# EAGLE board MAX3232_Breakout_Panel_v11 (EAGLE 6.6.0), part 1 of 2
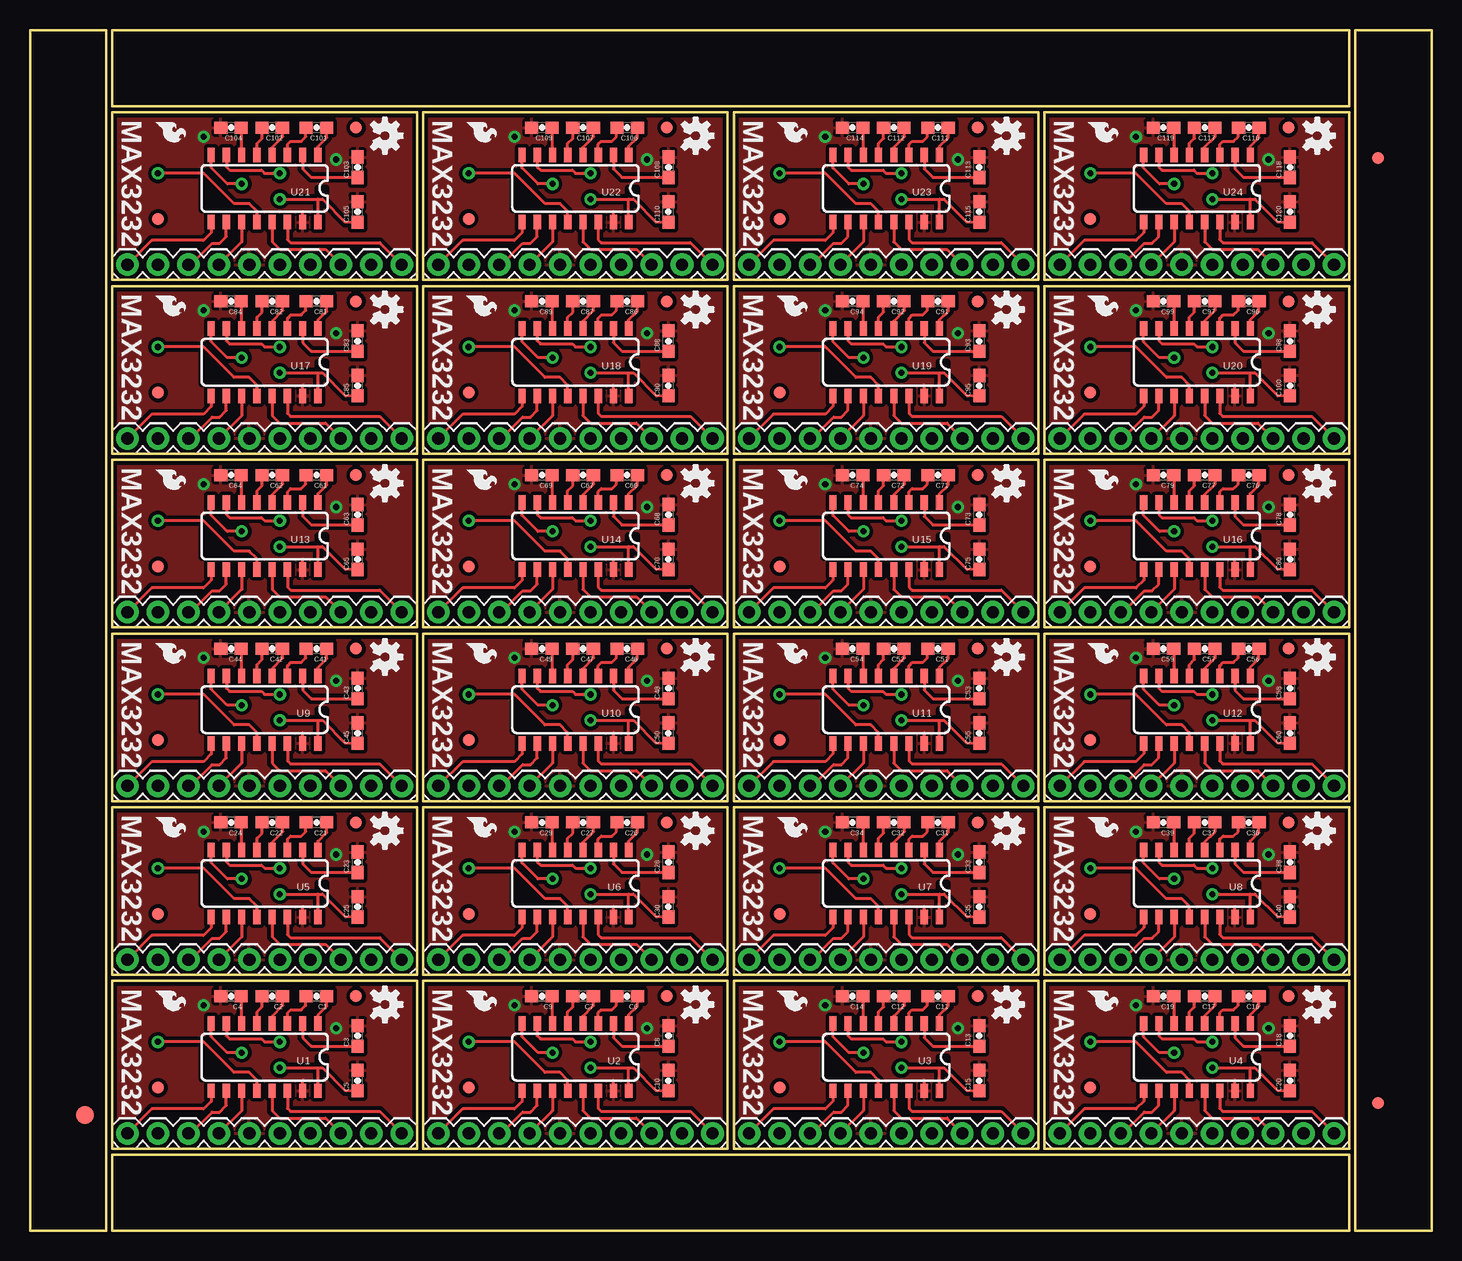
[diagram p0: board, top side]
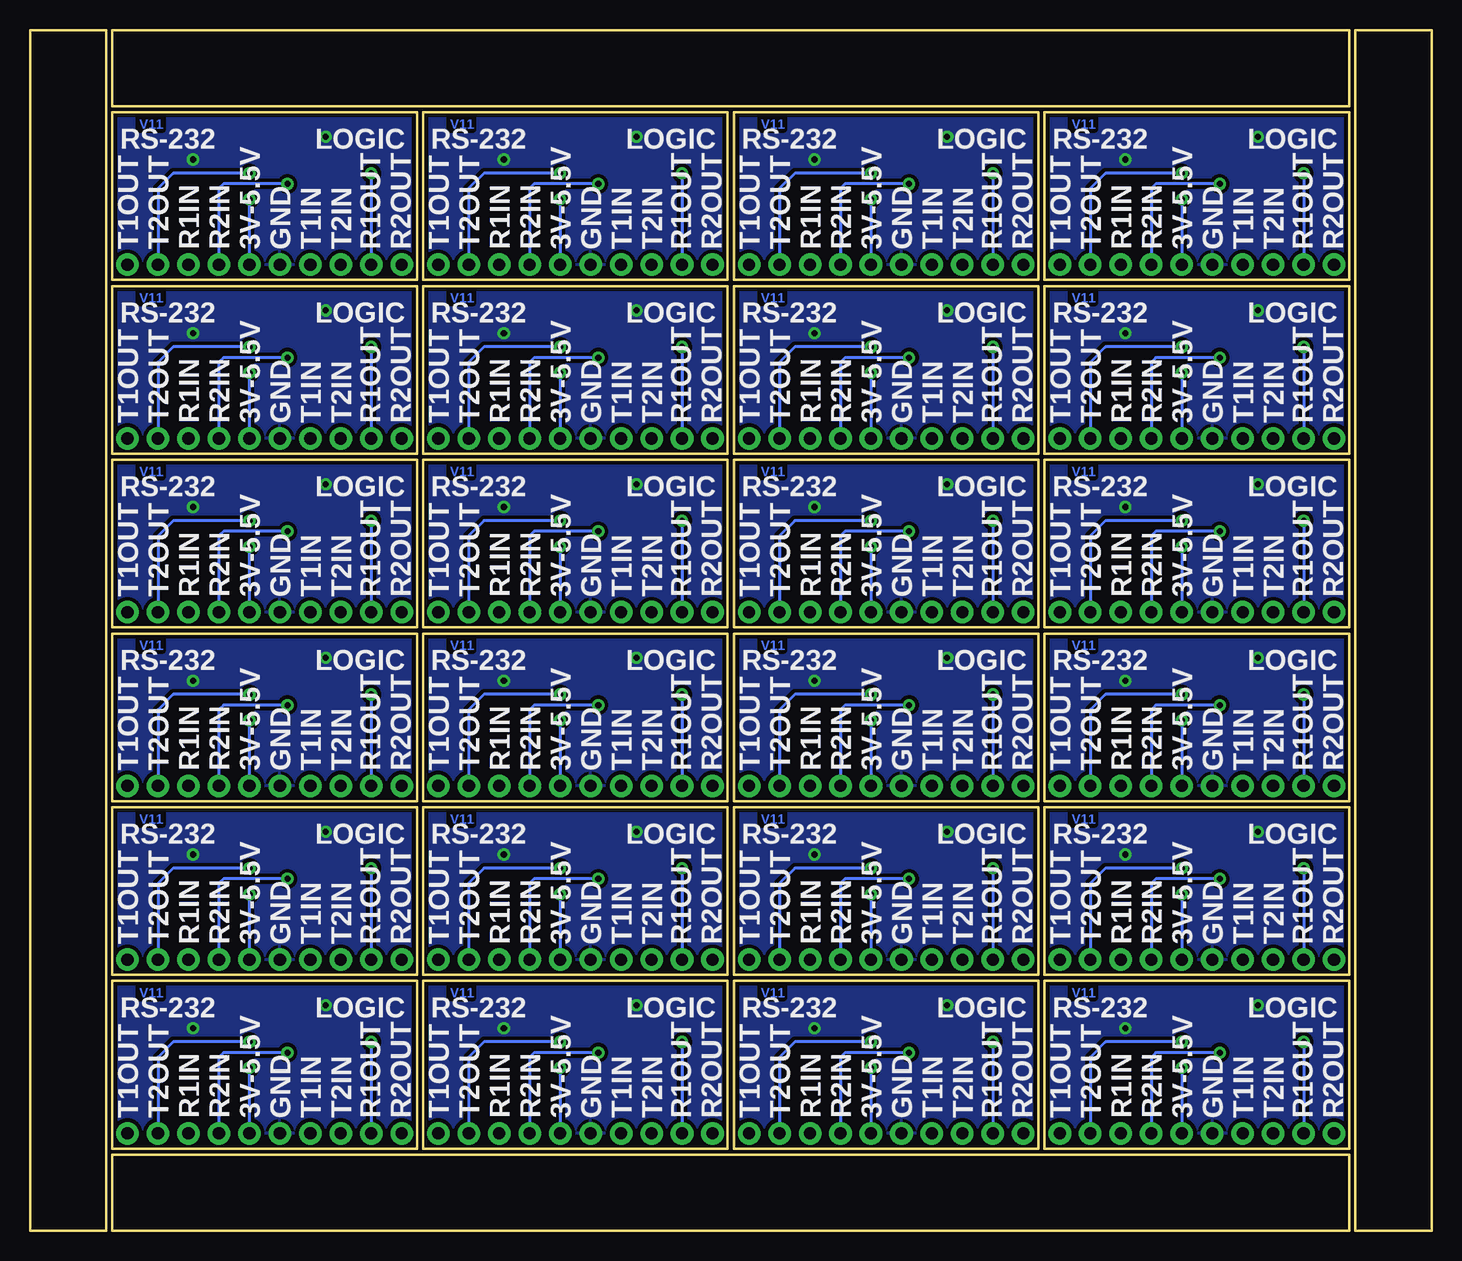
[diagram p1: board, bottom side, seen from below]

Size 116.84 x 100.08 mm. Coordinates in mm from the lower left corner, seen from the top.
Outline: 6.35,79.25 6.35,0 0,0 0,29.72
Outline: 116.84,79.25 116.84,0 110.49,0 110.49,29.72
Outline: 110.49,20.83 110.49,100.08 116.84,100.08 116.84,70.36
Outline: 0,20.83 0,100.08 6.35,100.08 6.35,70.36
Outline: 6.86,6.86 6.86,20.83 32.26,20.83 32.26,6.86 6.86,6.86
Outline: 32.77,6.86 32.77,20.83 58.17,20.83 58.17,6.86 32.77,6.86
Outline: 58.67,6.86 58.67,20.83 84.07,20.83 84.07,6.86 58.67,6.86
Outline: 84.58,6.86 84.58,20.83 109.98,20.83 109.98,6.86 84.58,6.86
Outline: 6.86,21.34 6.86,35.31 32.26,35.31 32.26,21.34 6.86,21.34
Outline: 32.77,21.34 32.77,35.31 58.17,35.31 58.17,21.34 32.77,21.34
Outline: 58.67,21.34 58.67,35.31 84.07,35.31 84.07,21.34 58.67,21.34
Outline: 84.58,21.34 84.58,35.31 109.98,35.31 109.98,21.34 84.58,21.34
Outline: 6.86,35.81 6.86,49.78 32.26,49.78 32.26,35.81 6.86,35.81
Outline: 32.77,35.81 32.77,49.78 58.17,49.78 58.17,35.81 32.77,35.81
Outline: 58.67,35.81 58.67,49.78 84.07,49.78 84.07,35.81 58.67,35.81
Outline: 84.58,35.81 84.58,49.78 109.98,49.78 109.98,35.81 84.58,35.81
Outline: 6.86,50.29 6.86,64.26 32.26,64.26 32.26,50.29 6.86,50.29
Outline: 32.77,50.29 32.77,64.26 58.17,64.26 58.17,50.29 32.77,50.29
Outline: 58.67,50.29 58.67,64.26 84.07,64.26 84.07,50.29 58.67,50.29
Outline: 84.58,50.29 84.58,64.26 109.98,64.26 109.98,50.29 84.58,50.29
Outline: 6.86,64.77 6.86,78.74 32.26,78.74 32.26,64.77 6.86,64.77
Outline: 32.77,64.77 32.77,78.74 58.17,78.74 58.17,64.77 32.77,64.77
Outline: 58.67,64.77 58.67,78.74 84.07,78.74 84.07,64.77 58.67,64.77
Outline: 84.58,64.77 84.58,78.74 109.98,78.74 109.98,64.77 84.58,64.77
Outline: 6.86,79.25 6.86,93.22 32.26,93.22 32.26,79.25 6.86,79.25
Outline: 32.77,79.25 32.77,93.22 58.17,93.22 58.17,79.25 32.77,79.25
Outline: 58.67,79.25 58.67,93.22 84.07,93.22 84.07,79.25 58.67,79.25
Outline: 84.58,79.25 84.58,93.22 109.98,93.22 109.98,79.25 84.58,79.25
Outline: 6.86,0 109.98,0 109.98,6.35 6.86,6.35 6.86,0
Outline: 109.98,100.08 6.86,100.08 6.86,93.73 109.98,93.73 109.98,100.08
Copper layers (1*16): Top 0.035mm / dielectric 1.5mm / Bottom 0.035mm
Design rules "SparkFun-2-layer": minimum track width 7mil, minimum drill 15mil, track to track 8mil, track to pad 8mil, pad to pad 8mil, via to via 8mil, smd to smd 8mil, copper to edge 8mil, drill to drill 8mil, minimum pad ring 12mil, minimum via ring 10mil, stop-mask expansion 4mil, vias tented up to drill 20mil, thermal gap 10mil
tRestrict: area 24,14.1 to 24.6,14.5; area 14.4,12.7 to 14.5,15.4; area 49.9,14.1 to 50.5,14.5; area 40.3,12.7 to 40.4,15.4; area 75.8,14.1 to 76.5,14.5; area 66.2,12.7 to 66.3,15.4; area 101.7,14.1 to 102.4,14.5; area 92.1,12.7 to 92.2,15.4; area 24,28.6 to 24.6,29; area 14.4,27.2 to 14.5,29.8; area 49.9,28.6 to 50.5,29; area 40.3,27.2 to 40.4,29.8; area 75.8,28.6 to 76.5,29; area 66.2,27.2 to 66.3,29.8; area 101.7,28.6 to 102.4,29; area 92.1,27.2 to 92.2,29.8; area 24,43.1 to 24.6,43.4; area 14.4,41.7 to 14.5,44.3; area 49.9,43.1 to 50.5,43.4; area 40.3,41.7 to 40.4,44.3; area 75.8,43.1 to 76.5,43.4; area 66.2,41.7 to 66.3,44.3; area 101.7,43.1 to 102.4,43.4; area 92.1,41.7 to 92.2,44.3; area 24,57.5 to 24.6,57.9; area 14.4,56.1 to 14.5,58.8; area 49.9,57.5 to 50.5,57.9; area 40.3,56.1 to 40.4,58.8; area 75.8,57.5 to 76.5,57.9; area 66.2,56.1 to 66.3,58.8; area 101.7,57.5 to 102.4,57.9; area 92.1,56.1 to 92.2,58.8; area 24,72 to 24.6,72.4; area 14.4,70.6 to 14.5,73.3; area 49.9,72 to 50.5,72.4; area 40.3,70.6 to 40.4,73.3; area 75.8,72 to 76.5,72.4; area 66.2,70.6 to 66.3,73.3; area 101.7,72 to 102.4,72.4; area 92.1,70.6 to 92.2,73.3; area 24,86.5 to 24.6,86.9; area 14.4,85.1 to 14.5,87.8; area 49.9,86.5 to 50.5,86.9; area 40.3,85.1 to 40.4,87.8; area 75.8,86.5 to 76.5,86.9; area 66.2,85.1 to 66.3,87.8; area 101.7,86.5 to 102.4,86.9; area 92.1,85.1 to 92.2,87.8

## Footprints (pad centres in the part's own frame; a part is rotated, then mirrored left to right if it is on the bottom)
0603-CAP = smd 1.1 x 1: 1 -0.85,0; 2 0.85,0
FIDUCIAL-1.5X3 = smd 1.5 x 1.5: 1 0,0
FIDUCIAL-1X2 = smd 1 x 1: 1 0,0
1X10 = drill 1.016 pad 1.88: 1 0,0; 2 2.54,0; 3 5.08,0; 4 7.62,0; 5 10.16,0; 6 12.7,0; 7 15.24,0; 8 17.78,0; 9 20.32,0; 10 22.86,0
SO016 = smd 0.6 x 1.2: 1 -4.445,-2.8; 2 -3.175,-2.8; 3 -1.905,-2.8; 4 -0.635,-2.8; 5 0.635,-2.8; 6 1.905,-2.8; 7 3.175,-2.8; 8 4.445,-2.8; 9 4.445,2.8; 10 3.175,2.8; 11 1.905,2.8; 12 0.635,2.8; 13 -0.635,2.8; 14 -1.905,2.8; 15 -3.175,2.8; 16 -4.445,2.8

## Placement (x,y rotation side)
C1  .1uF  [0603-CAP]  23.88,19.56 180 top
C2  .1uF  [0603-CAP]  20.19,19.56 180 top
C3  .1uF  [0603-CAP]  27.31,16.25 90 top
C4  .1uF  [0603-CAP]  16.76,19.56 180 top
C5  .1uF  [0603-CAP]  27.31,12.53 90 top
C6  .1uF  [0603-CAP]  49.78,19.56 180 top
C7  .1uF  [0603-CAP]  46.1,19.56 180 top
C8  .1uF  [0603-CAP]  53.22,16.25 90 top
C9  .1uF  [0603-CAP]  42.67,19.56 180 top
C10  .1uF  [0603-CAP]  53.22,12.53 90 top
C11  .1uF  [0603-CAP]  75.69,19.56 180 top
C12  .1uF  [0603-CAP]  72.01,19.56 180 top
C13  .1uF  [0603-CAP]  79.13,16.25 90 top
C14  .1uF  [0603-CAP]  68.58,19.56 180 top
C15  .1uF  [0603-CAP]  79.13,12.53 90 top
C16  .1uF  [0603-CAP]  101.6,19.56 180 top
C17  .1uF  [0603-CAP]  97.92,19.56 180 top
C18  .1uF  [0603-CAP]  105.04,16.25 90 top
C19  .1uF  [0603-CAP]  94.49,19.56 180 top
C20  .1uF  [0603-CAP]  105.03,12.53 90 top
C21  .1uF  [0603-CAP]  23.88,34.04 180 top
C22  .1uF  [0603-CAP]  20.19,34.04 180 top
C23  .1uF  [0603-CAP]  27.31,30.72 90 top
C24  .1uF  [0603-CAP]  16.76,34.04 180 top
C25  .1uF  [0603-CAP]  27.31,27.01 90 top
C26  .1uF  [0603-CAP]  49.78,34.04 180 top
C27  .1uF  [0603-CAP]  46.1,34.04 180 top
C28  .1uF  [0603-CAP]  53.22,30.72 90 top
C29  .1uF  [0603-CAP]  42.67,34.04 180 top
C30  .1uF  [0603-CAP]  53.22,27.01 90 top
C31  .1uF  [0603-CAP]  75.69,34.04 180 top
C32  .1uF  [0603-CAP]  72.01,34.04 180 top
C33  .1uF  [0603-CAP]  79.13,30.72 90 top
C34  .1uF  [0603-CAP]  68.58,34.04 180 top
C35  .1uF  [0603-CAP]  79.13,27.01 90 top
C36  .1uF  [0603-CAP]  101.6,34.04 180 top
C37  .1uF  [0603-CAP]  97.92,34.04 180 top
C38  .1uF  [0603-CAP]  105.04,30.72 90 top
C39  .1uF  [0603-CAP]  94.49,34.04 180 top
C40  .1uF  [0603-CAP]  105.03,27.01 90 top
C41  .1uF  [0603-CAP]  23.88,48.51 180 top
C42  .1uF  [0603-CAP]  20.19,48.51 180 top
C43  .1uF  [0603-CAP]  27.31,45.2 90 top
C44  .1uF  [0603-CAP]  16.76,48.51 180 top
C45  .1uF  [0603-CAP]  27.31,41.48 90 top
C46  .1uF  [0603-CAP]  49.78,48.51 180 top
C47  .1uF  [0603-CAP]  46.1,48.51 180 top
C48  .1uF  [0603-CAP]  53.22,45.2 90 top
C49  .1uF  [0603-CAP]  42.67,48.51 180 top
C50  .1uF  [0603-CAP]  53.22,41.48 90 top
C51  .1uF  [0603-CAP]  75.69,48.51 180 top
C52  .1uF  [0603-CAP]  72.01,48.51 180 top
C53  .1uF  [0603-CAP]  79.13,45.2 90 top
C54  .1uF  [0603-CAP]  68.58,48.51 180 top
C55  .1uF  [0603-CAP]  79.13,41.48 90 top
C56  .1uF  [0603-CAP]  101.6,48.51 180 top
C57  .1uF  [0603-CAP]  97.92,48.51 180 top
C58  .1uF  [0603-CAP]  105.04,45.2 90 top
C59  .1uF  [0603-CAP]  94.49,48.51 180 top
C60  .1uF  [0603-CAP]  105.03,41.48 90 top
C61  .1uF  [0603-CAP]  23.88,62.99 180 top
C62  .1uF  [0603-CAP]  20.19,62.99 180 top
C63  .1uF  [0603-CAP]  27.31,59.68 90 top
C64  .1uF  [0603-CAP]  16.76,62.99 180 top
C65  .1uF  [0603-CAP]  27.31,55.96 90 top
C66  .1uF  [0603-CAP]  49.78,62.99 180 top
C67  .1uF  [0603-CAP]  46.1,62.99 180 top
C68  .1uF  [0603-CAP]  53.22,59.68 90 top
C69  .1uF  [0603-CAP]  42.67,62.99 180 top
C70  .1uF  [0603-CAP]  53.22,55.96 90 top
C71  .1uF  [0603-CAP]  75.69,62.99 180 top
C72  .1uF  [0603-CAP]  72.01,62.99 180 top
C73  .1uF  [0603-CAP]  79.13,59.68 90 top
C74  .1uF  [0603-CAP]  68.58,62.99 180 top
C75  .1uF  [0603-CAP]  79.13,55.96 90 top
C76  .1uF  [0603-CAP]  101.6,62.99 180 top
C77  .1uF  [0603-CAP]  97.92,62.99 180 top
C78  .1uF  [0603-CAP]  105.04,59.68 90 top
C79  .1uF  [0603-CAP]  94.49,62.99 180 top
C80  .1uF  [0603-CAP]  105.03,55.96 90 top
C81  .1uF  [0603-CAP]  23.88,77.47 180 top
C82  .1uF  [0603-CAP]  20.19,77.47 180 top
C83  .1uF  [0603-CAP]  27.31,74.16 90 top
C84  .1uF  [0603-CAP]  16.76,77.47 180 top
C85  .1uF  [0603-CAP]  27.31,70.44 90 top
C86  .1uF  [0603-CAP]  49.78,77.47 180 top
C87  .1uF  [0603-CAP]  46.1,77.47 180 top
C88  .1uF  [0603-CAP]  53.22,74.16 90 top
C89  .1uF  [0603-CAP]  42.67,77.47 180 top
C90  .1uF  [0603-CAP]  53.22,70.44 90 top
C91  .1uF  [0603-CAP]  75.69,77.47 180 top
C92  .1uF  [0603-CAP]  72.01,77.47 180 top
C93  .1uF  [0603-CAP]  79.13,74.16 90 top
C94  .1uF  [0603-CAP]  68.58,77.47 180 top
C95  .1uF  [0603-CAP]  79.13,70.44 90 top
C96  .1uF  [0603-CAP]  101.6,77.47 180 top
C97  .1uF  [0603-CAP]  97.92,77.47 180 top
C98  .1uF  [0603-CAP]  105.04,74.16 90 top
C99  .1uF  [0603-CAP]  94.49,77.47 180 top
C100  .1uF  [0603-CAP]  105.03,70.44 90 top
C101  .1uF  [0603-CAP]  23.88,91.95 180 top
C102  .1uF  [0603-CAP]  20.19,91.95 180 top
C103  .1uF  [0603-CAP]  27.31,88.64 90 top
C104  .1uF  [0603-CAP]  16.76,91.95 180 top
C105  .1uF  [0603-CAP]  27.31,84.92 90 top
C106  .1uF  [0603-CAP]  49.78,91.95 180 top
C107  .1uF  [0603-CAP]  46.1,91.95 180 top
C108  .1uF  [0603-CAP]  53.22,88.64 90 top
C109  .1uF  [0603-CAP]  42.67,91.95 180 top
C110  .1uF  [0603-CAP]  53.22,84.92 90 top
C111  .1uF  [0603-CAP]  75.69,91.95 180 top
C112  .1uF  [0603-CAP]  72.01,91.95 180 top
C113  .1uF  [0603-CAP]  79.13,88.64 90 top
C114  .1uF  [0603-CAP]  68.58,91.95 180 top
C115  .1uF  [0603-CAP]  79.13,84.92 90 top
C116  .1uF  [0603-CAP]  101.6,91.95 180 top
C117  .1uF  [0603-CAP]  97.92,91.95 180 top
C118  .1uF  [0603-CAP]  105.04,88.64 90 top
C119  .1uF  [0603-CAP]  94.49,91.95 180 top
C120  .1uF  [0603-CAP]  105.03,84.92 90 top
E$1  [FIDUCIAL-1.5X3]  4.57,9.65 0 top
E$4  [FIDUCIAL-1X2]  112.39,10.67 0 top
E$5  [FIDUCIAL-1X2]  112.39,89.41 180 top
FID1  FIDUCIAL1X2  [FIDUCIAL-1X2]  10.67,11.94 0 top
FID2  FIDUCIAL1X2  [FIDUCIAL-1X2]  27.18,19.56 0 top
FID3  FIDUCIAL1X2  [FIDUCIAL-1X2]  36.58,11.94 0 top
FID4  FIDUCIAL1X2  [FIDUCIAL-1X2]  53.09,19.56 0 top
FID5  FIDUCIAL1X2  [FIDUCIAL-1X2]  62.48,11.94 0 top
FID6  FIDUCIAL1X2  [FIDUCIAL-1X2]  78.99,19.56 0 top
FID7  FIDUCIAL1X2  [FIDUCIAL-1X2]  88.39,11.94 0 top
FID8  FIDUCIAL1X2  [FIDUCIAL-1X2]  104.9,19.56 0 top
FID9  FIDUCIAL1X2  [FIDUCIAL-1X2]  10.67,26.42 0 top
FID10  FIDUCIAL1X2  [FIDUCIAL-1X2]  27.18,34.04 0 top
FID11  FIDUCIAL1X2  [FIDUCIAL-1X2]  36.58,26.42 0 top
FID12  FIDUCIAL1X2  [FIDUCIAL-1X2]  53.09,34.04 0 top
FID13  FIDUCIAL1X2  [FIDUCIAL-1X2]  62.48,26.42 0 top
FID14  FIDUCIAL1X2  [FIDUCIAL-1X2]  78.99,34.04 0 top
FID15  FIDUCIAL1X2  [FIDUCIAL-1X2]  88.39,26.42 0 top
FID16  FIDUCIAL1X2  [FIDUCIAL-1X2]  104.9,34.04 0 top
FID17  FIDUCIAL1X2  [FIDUCIAL-1X2]  10.67,40.89 0 top
FID18  FIDUCIAL1X2  [FIDUCIAL-1X2]  27.18,48.51 0 top
FID19  FIDUCIAL1X2  [FIDUCIAL-1X2]  36.58,40.89 0 top
FID20  FIDUCIAL1X2  [FIDUCIAL-1X2]  53.09,48.51 0 top
FID21  FIDUCIAL1X2  [FIDUCIAL-1X2]  62.48,40.89 0 top
FID22  FIDUCIAL1X2  [FIDUCIAL-1X2]  78.99,48.51 0 top
FID23  FIDUCIAL1X2  [FIDUCIAL-1X2]  88.39,40.89 0 top
FID24  FIDUCIAL1X2  [FIDUCIAL-1X2]  104.9,48.51 0 top
FID25  FIDUCIAL1X2  [FIDUCIAL-1X2]  10.67,55.37 0 top
FID26  FIDUCIAL1X2  [FIDUCIAL-1X2]  27.18,62.99 0 top
FID27  FIDUCIAL1X2  [FIDUCIAL-1X2]  36.58,55.37 0 top
FID28  FIDUCIAL1X2  [FIDUCIAL-1X2]  53.09,62.99 0 top
FID29  FIDUCIAL1X2  [FIDUCIAL-1X2]  62.48,55.37 0 top
FID30  FIDUCIAL1X2  [FIDUCIAL-1X2]  78.99,62.99 0 top
FID31  FIDUCIAL1X2  [FIDUCIAL-1X2]  88.39,55.37 0 top
FID32  FIDUCIAL1X2  [FIDUCIAL-1X2]  104.9,62.99 0 top
FID33  FIDUCIAL1X2  [FIDUCIAL-1X2]  10.67,69.85 0 top
FID34  FIDUCIAL1X2  [FIDUCIAL-1X2]  27.18,77.47 0 top
FID35  FIDUCIAL1X2  [FIDUCIAL-1X2]  36.58,69.85 0 top
FID36  FIDUCIAL1X2  [FIDUCIAL-1X2]  53.09,77.47 0 top
FID37  FIDUCIAL1X2  [FIDUCIAL-1X2]  62.48,69.85 0 top
FID38  FIDUCIAL1X2  [FIDUCIAL-1X2]  78.99,77.47 0 top
FID39  FIDUCIAL1X2  [FIDUCIAL-1X2]  88.39,69.85 0 top
FID40  FIDUCIAL1X2  [FIDUCIAL-1X2]  104.9,77.47 0 top
FID41  FIDUCIAL1X2  [FIDUCIAL-1X2]  10.67,84.33 0 top
FID42  FIDUCIAL1X2  [FIDUCIAL-1X2]  27.18,91.95 0 top
FID43  FIDUCIAL1X2  [FIDUCIAL-1X2]  36.58,84.33 0 top
FID44  FIDUCIAL1X2  [FIDUCIAL-1X2]  53.09,91.95 0 top
FID45  FIDUCIAL1X2  [FIDUCIAL-1X2]  62.48,84.33 0 top
FID46  FIDUCIAL1X2  [FIDUCIAL-1X2]  78.99,91.95 0 top
FID47  FIDUCIAL1X2  [FIDUCIAL-1X2]  88.39,84.33 0 top
FID48  FIDUCIAL1X2  [FIDUCIAL-1X2]  104.9,91.95 0 top
JP1  M10"  [1X10]  56.9,8.13 180 top
JP2  M10"  [1X10]  30.99,8.13 180 top
JP3  M10"  [1X10]  82.8,8.13 180 top
JP4  M10"  [1X10]  108.71,8.13 180 top
JP5  M10"  [1X10]  30.99,22.61 180 top
JP6  M10"  [1X10]  56.9,22.61 180 top
JP7  M10"  [1X10]  82.8,22.61 180 top
JP8  M10"  [1X10]  108.71,22.61 180 top
JP9  M10"  [1X10]  30.99,37.08 180 top
JP10  M10"  [1X10]  56.9,37.08 180 top
JP11  M10"  [1X10]  82.8,37.08 180 top
JP12  M10"  [1X10]  108.71,37.08 180 top
JP13  M10"  [1X10]  30.99,51.56 180 top
JP14  M10"  [1X10]  56.9,51.56 180 top
JP15  M10"  [1X10]  82.8,51.56 180 top
JP16  M10"  [1X10]  108.71,51.56 180 top
JP17  M10"  [1X10]  30.99,66.04 180 top
JP18  M10"  [1X10]  56.9,66.04 180 top
JP19  M10"  [1X10]  82.8,66.04 180 top
JP20  M10"  [1X10]  108.71,66.04 180 top
JP21  M10"  [1X10]  30.99,80.52 180 top
JP22  M10"  [1X10]  56.9,80.52 180 top
JP23  M10"  [1X10]  82.8,80.52 180 top
JP24  M10"  [1X10]  108.71,80.52 180 top
LOGO1  SFE_LOGO_FLAME.1_INCH  [SFE_LOGO_FLAME_.1]  10.1,20.32 270 top
LOGO2  SFE_LOGO_FLAME.1_INCH  [SFE_LOGO_FLAME_.1]  36.01,20.32 270 top
LOGO3  SFE_LOGO_FLAME.1_INCH  [SFE_LOGO_FLAME_.1]  61.92,20.32 270 top
LOGO4  SFE_LOGO_FLAME.1_INCH  [SFE_LOGO_FLAME_.1]  87.82,20.32 270 top
LOGO5  SFE_LOGO_FLAME.1_INCH  [SFE_LOGO_FLAME_.1]  10.1,34.8 270 top
LOGO6  SFE_LOGO_FLAME.1_INCH  [SFE_LOGO_FLAME_.1]  36.01,34.8 270 top
LOGO7  SFE_LOGO_FLAME.1_INCH  [SFE_LOGO_FLAME_.1]  61.92,34.8 270 top
LOGO8  SFE_LOGO_FLAME.1_INCH  [SFE_LOGO_FLAME_.1]  87.82,34.8 270 top
LOGO9  SFE_LOGO_FLAME.1_INCH  [SFE_LOGO_FLAME_.1]  10.1,49.28 270 top
LOGO10  SFE_LOGO_FLAME.1_INCH  [SFE_LOGO_FLAME_.1]  36.01,49.28 270 top
LOGO11  SFE_LOGO_FLAME.1_INCH  [SFE_LOGO_FLAME_.1]  61.92,49.28 270 top
LOGO12  SFE_LOGO_FLAME.1_INCH  [SFE_LOGO_FLAME_.1]  87.82,49.28 270 top
LOGO13  SFE_LOGO_FLAME.1_INCH  [SFE_LOGO_FLAME_.1]  10.1,63.75 270 top
LOGO14  SFE_LOGO_FLAME.1_INCH  [SFE_LOGO_FLAME_.1]  36.01,63.75 270 top
LOGO15  SFE_LOGO_FLAME.1_INCH  [SFE_LOGO_FLAME_.1]  61.92,63.75 270 top
LOGO16  SFE_LOGO_FLAME.1_INCH  [SFE_LOGO_FLAME_.1]  87.82,63.75 270 top
LOGO17  SFE_LOGO_FLAME.1_INCH  [SFE_LOGO_FLAME_.1]  10.1,78.23 270 top
LOGO18  SFE_LOGO_FLAME.1_INCH  [SFE_LOGO_FLAME_.1]  36.01,78.23 270 top
LOGO19  SFE_LOGO_FLAME.1_INCH  [SFE_LOGO_FLAME_.1]  61.92,78.23 270 top
LOGO20  SFE_LOGO_FLAME.1_INCH  [SFE_LOGO_FLAME_.1]  87.82,78.23 270 top
LOGO21  SFE_LOGO_FLAME.1_INCH  [SFE_LOGO_FLAME_.1]  10.1,92.71 270 top
LOGO22  SFE_LOGO_FLAME.1_INCH  [SFE_LOGO_FLAME_.1]  36.01,92.71 270 top
LOGO23  SFE_LOGO_FLAME.1_INCH  [SFE_LOGO_FLAME_.1]  61.92,92.71 270 top
LOGO24  SFE_LOGO_FLAME.1_INCH  [SFE_LOGO_FLAME_.1]  87.82,92.71 270 top
U1  MAX3232  [SO016]  19.56,14.48 180 top
U2  MAX3232  [SO016]  45.47,14.48 180 top
U3  MAX3232  [SO016]  71.37,14.48 180 top
U4  MAX3232  [SO016]  97.28,14.48 180 top
U5  MAX3232  [SO016]  19.56,28.96 180 top
U6  MAX3232  [SO016]  45.47,28.96 180 top
U7  MAX3232  [SO016]  71.37,28.96 180 top
U8  MAX3232  [SO016]  97.28,28.96 180 top
U9  MAX3232  [SO016]  19.56,43.43 180 top
U10  MAX3232  [SO016]  45.47,43.43 180 top
U11  MAX3232  [SO016]  71.37,43.43 180 top
U12  MAX3232  [SO016]  97.28,43.43 180 top
U13  MAX3232  [SO016]  19.56,57.91 180 top
U14  MAX3232  [SO016]  45.47,57.91 180 top
U15  MAX3232  [SO016]  71.37,57.91 180 top
U16  MAX3232  [SO016]  97.28,57.91 180 top
U17  MAX3232  [SO016]  19.56,72.39 180 top
U18  MAX3232  [SO016]  45.47,72.39 180 top
U19  MAX3232  [SO016]  71.37,72.39 180 top
U20  MAX3232  [SO016]  97.28,72.39 180 top
U21  MAX3232  [SO016]  19.56,86.87 180 top
U22  MAX3232  [SO016]  45.47,86.87 180 top
U23  MAX3232  [SO016]  71.37,86.87 180 top
U24  MAX3232  [SO016]  97.28,86.87 180 top
U$1  OSHW-LOGOS  [OSHW-LOGO-S]  29.59,18.87 270 top
U$2  OSHW-LOGOS  [OSHW-LOGO-S]  55.49,18.87 270 top
U$3  OSHW-LOGOS  [OSHW-LOGO-S]  81.4,18.87 270 top
U$4  OSHW-LOGOS  [OSHW-LOGO-S]  107.31,18.87 270 top
U$5  OSHW-LOGOS  [OSHW-LOGO-S]  29.59,33.35 270 top
U$6  OSHW-LOGOS  [OSHW-LOGO-S]  55.49,33.35 270 top
U$7  OSHW-LOGOS  [OSHW-LOGO-S]  81.4,33.35 270 top
U$8  OSHW-LOGOS  [OSHW-LOGO-S]  107.31,33.35 270 top
U$9  OSHW-LOGOS  [OSHW-LOGO-S]  29.59,47.83 270 top
U$10  OSHW-LOGOS  [OSHW-LOGO-S]  55.49,47.83 270 top
U$11  OSHW-LOGOS  [OSHW-LOGO-S]  81.4,47.83 270 top
U$12  OSHW-LOGOS  [OSHW-LOGO-S]  107.31,47.83 270 top
U$13  OSHW-LOGOS  [OSHW-LOGO-S]  29.59,62.3 270 top
U$14  OSHW-LOGOS  [OSHW-LOGO-S]  55.49,62.3 270 top
U$15  OSHW-LOGOS  [OSHW-LOGO-S]  81.4,62.3 270 top
U$16  OSHW-LOGOS  [OSHW-LOGO-S]  107.31,62.3 270 top
U$17  OSHW-LOGOS  [OSHW-LOGO-S]  29.59,76.78 270 top
U$18  OSHW-LOGOS  [OSHW-LOGO-S]  55.49,76.78 270 top
U$19  OSHW-LOGOS  [OSHW-LOGO-S]  81.4,76.78 270 top
U$20  OSHW-LOGOS  [OSHW-LOGO-S]  107.31,76.78 270 top
U$21  OSHW-LOGOS  [OSHW-LOGO-S]  29.59,91.26 270 top
U$22  OSHW-LOGOS  [OSHW-LOGO-S]  55.49,91.26 270 top
U$23  OSHW-LOGOS  [OSHW-LOGO-S]  81.4,91.26 270 top
U$24  OSHW-LOGOS  [OSHW-LOGO-S]  107.31,91.26 270 top

## Library data of the parts
C1-C120 = SparkFun-Capacitors; PROD_ID: CAP-00810; SPARKLE_ID: 918; VALUE: 0.1uF
E$1 = SparkFun-Retired
E$4 E$5 FID1-FID48 LOGO1-LOGO24 = SparkFun-Aesthetics
JP1-JP24 = SparkFun-Connectors; NO_PART: 1
U1-U24 = SparkFun-DigitalIC; PROD_ID: IC-08171
U$1-U$24 = SparkFun-Aesthetics; NO_PART: 1

## Nets
C1+: C1.1 U1.1
C1+1: C6.1 U2.1
C1+2: C11.1 U3.1
C1+3: C16.1 U4.1
C1+4: C21.1 U5.1
C1+5: C26.1 U6.1
C1+6: C31.1 U7.1
C1+7: C36.1 U8.1
C1+8: C41.1 U9.1
C1+9: C46.1 U10.1
C1+10: C51.1 U11.1
C1+11: C56.1 U12.1
C1+12: C61.1 U13.1
C1+13: C66.1 U14.1
C1+14: C71.1 U15.1
C1+15: C76.1 U16.1
C1+16: C81.1 U17.1
C1+17: C86.1 U18.1
C1+18: C91.1 U19.1
C1+19: C96.1 U20.1
C1+20: C101.1 U21.1
C1+21: C106.1 U22.1
C1+22: C111.1 U23.1
C1+23: C116.1 U24.1
C1-: C1.2 U1.3
C1-1: C6.2 U2.3
C1-2: C11.2 U3.3
C1-3: C16.2 U4.3
C1-4: C21.2 U5.3
C1-5: C26.2 U6.3
C1-6: C31.2 U7.3
C1-7: C36.2 U8.3
C1-8: C41.2 U9.3
C1-9: C46.2 U10.3
C1-10: C51.2 U11.3
C1-11: C56.2 U12.3
C1-12: C61.2 U13.3
C1-13: C66.2 U14.3
C1-14: C71.2 U15.3
C1-15: C76.2 U16.3
C1-16: C81.2 U17.3
C1-17: C86.2 U18.3
C1-18: C91.2 U19.3
C1-19: C96.2 U20.3
C1-20: C101.2 U21.3
C1-21: C106.2 U22.3
C1-22: C111.2 U23.3
C1-23: C116.2 U24.3
C2+: C2.1 U1.4
C2+1: C7.1 U2.4
C2+2: C12.1 U3.4
C2+3: C17.1 U4.4
C2+4: C22.1 U5.4
C2+5: C27.1 U6.4
C2+6: C32.1 U7.4
C2+7: C37.1 U8.4
C2+8: C42.1 U9.4
C2+9: C47.1 U10.4
C2+10: C52.1 U11.4
C2+11: C57.1 U12.4
C2+12: C62.1 U13.4
C2+13: C67.1 U14.4
C2+14: C72.1 U15.4
C2+15: C77.1 U16.4
C2+16: C82.1 U17.4
C2+17: C87.1 U18.4
C2+18: C92.1 U19.4
C2+19: C97.1 U20.4
C2+20: C102.1 U21.4
C2+21: C107.1 U22.4
C2+22: C112.1 U23.4
C2+23: C117.1 U24.4
C2-: C2.2 U1.5
C2-1: C7.2 U2.5
C2-2: C12.2 U3.5
C2-3: C17.2 U4.5
C2-4: C22.2 U5.5
C2-5: C27.2 U6.5
C2-6: C32.2 U7.5
C2-7: C37.2 U8.5
C2-8: C42.2 U9.5
C2-9: C47.2 U10.5
C2-10: C52.2 U11.5
C2-11: C57.2 U12.5
C2-12: C62.2 U13.5
C2-13: C67.2 U14.5
C2-14: C72.2 U15.5
C2-15: C77.2 U16.5
C2-16: C82.2 U17.5
C2-17: C87.2 U18.5
C2-18: C92.2 U19.5
C2-19: C97.2 U20.5
C2-20: C102.2 U21.5
C2-21: C107.2 U22.5
C2-22: C112.2 U23.5
C2-23: C117.2 U24.5
GND: C3.2 C4.2 C5.2 JP2.6 U1.15
GND1: C8.2 C9.2 C10.2 JP1.6 U2.15
GND2: C13.2 C14.2 C15.2 JP3.6 U3.15
GND3: C18.2 C19.2 C20.2 JP4.6 U4.15
GND4: C23.2 C24.2 C25.2 JP5.6 U5.15
GND5: C28.2 C29.2 C30.2 JP6.6 U6.15
GND6: C33.2 C34.2 C35.2 JP7.6 U7.15
GND7: C38.2 C39.2 C40.2 JP8.6 U8.15
GND8: C43.2 C44.2 C45.2 JP9.6 U9.15
GND9: C48.2 C49.2 C50.2 JP10.6 U10.15
GND10: C53.2 C54.2 C55.2 JP11.6 U11.15
GND11: C58.2 C59.2 C60.2 JP12.6 U12.15
GND12: C63.2 C64.2 C65.2 JP13.6 U13.15
GND13: C68.2 C69.2 C70.2 JP14.6 U14.15
GND14: C73.2 C74.2 C75.2 JP15.6 U15.15
GND15: C78.2 C79.2 C80.2 JP16.6 U16.15
GND16: C83.2 C84.2 C85.2 JP17.6 U17.15
GND17: C88.2 C89.2 C90.2 JP18.6 U18.15
GND18: C93.2 C94.2 C95.2 JP19.6 U19.15
GND19: C98.2 C99.2 C100.2 JP20.6 U20.15
GND20: C103.2 C104.2 C105.2 JP21.6 U21.15
GND21: C108.2 C109.2 C110.2 JP22.6 U22.15
GND22: C113.2 C114.2 C115.2 JP23.6 U23.15
GND23: C118.2 C119.2 C120.2 JP24.6 U24.15
R1IN: JP2.3 U1.13
R1IN1: JP1.3 U2.13
R1IN2: JP3.3 U3.13
R1IN3: JP4.3 U4.13
R1IN4: JP5.3 U5.13
R1IN5: JP6.3 U6.13
R1IN6: JP7.3 U7.13
R1IN7: JP8.3 U8.13
R1IN8: JP9.3 U9.13
R1IN9: JP10.3 U10.13
R1IN10: JP11.3 U11.13
R1IN11: JP12.3 U12.13
R1IN12: JP13.3 U13.13
R1IN13: JP14.3 U14.13
R1IN14: JP15.3 U15.13
R1IN15: JP16.3 U16.13
R1IN16: JP17.3 U17.13
R1IN17: JP18.3 U18.13
R1IN18: JP19.3 U19.13
R1IN19: JP20.3 U20.13
R1IN20: JP21.3 U21.13
R1IN21: JP22.3 U22.13
R1IN22: JP23.3 U23.13
R1IN23: JP24.3 U24.13
R1OUT: JP2.9 U1.12
R1OUT1: JP1.9 U2.12
R1OUT2: JP3.9 U3.12
R1OUT3: JP4.9 U4.12
R1OUT4: JP5.9 U5.12
R1OUT5: JP6.9 U6.12
R1OUT6: JP7.9 U7.12
R1OUT7: JP8.9 U8.12
R1OUT8: JP9.9 U9.12
R1OUT9: JP10.9 U10.12
R1OUT10: JP11.9 U11.12
R1OUT11: JP12.9 U12.12
R1OUT12: JP13.9 U13.12
R1OUT13: JP14.9 U14.12
R1OUT14: JP15.9 U15.12
R1OUT15: JP16.9 U16.12
R1OUT16: JP17.9 U17.12
R1OUT17: JP18.9 U18.12
R1OUT18: JP19.9 U19.12
R1OUT19: JP20.9 U20.12
R1OUT20: JP21.9 U21.12
R1OUT21: JP22.9 U22.12
R1OUT22: JP23.9 U23.12
R1OUT23: JP24.9 U24.12
R2IN: JP2.4 U1.8
R2IN1: JP1.4 U2.8
R2IN2: JP3.4 U3.8
R2IN3: JP4.4 U4.8
R2IN4: JP5.4 U5.8
R2IN5: JP6.4 U6.8
R2IN6: JP7.4 U7.8
R2IN7: JP8.4 U8.8
R2IN8: JP9.4 U9.8
R2IN9: JP10.4 U10.8
R2IN10: JP11.4 U11.8
R2IN11: JP12.4 U12.8
R2IN12: JP13.4 U13.8
R2IN13: JP14.4 U14.8
R2IN14: JP15.4 U15.8
R2IN15: JP16.4 U16.8
R2IN16: JP17.4 U17.8
R2IN17: JP18.4 U18.8
R2IN18: JP19.4 U19.8
R2IN19: JP20.4 U20.8
R2IN20: JP21.4 U21.8
R2IN21: JP22.4 U22.8
R2IN22: JP23.4 U23.8
R2IN23: JP24.4 U24.8
R2OUT: JP2.10 U1.9
R2OUT1: JP1.10 U2.9
R2OUT2: JP3.10 U3.9
R2OUT3: JP4.10 U4.9
R2OUT4: JP5.10 U5.9
R2OUT5: JP6.10 U6.9
R2OUT6: JP7.10 U7.9
R2OUT7: JP8.10 U8.9
R2OUT8: JP9.10 U9.9
R2OUT9: JP10.10 U10.9
R2OUT10: JP11.10 U11.9
R2OUT11: JP12.10 U12.9
R2OUT12: JP13.10 U13.9
R2OUT13: JP14.10 U14.9
R2OUT14: JP15.10 U15.9
R2OUT15: JP16.10 U16.9
R2OUT16: JP17.10 U17.9
R2OUT17: JP18.10 U18.9
R2OUT18: JP19.10 U19.9
R2OUT19: JP20.10 U20.9
R2OUT20: JP21.10 U21.9
R2OUT21: JP22.10 U22.9
R2OUT22: JP23.10 U23.9
R2OUT23: JP24.10 U24.9
T1IN: JP2.7 U1.11
T1IN1: JP1.7 U2.11
T1IN2: JP3.7 U3.11
T1IN3: JP4.7 U4.11
T1IN4: JP5.7 U5.11
T1IN5: JP6.7 U6.11
T1IN6: JP7.7 U7.11
T1IN7: JP8.7 U8.11
T1IN8: JP9.7 U9.11
T1IN9: JP10.7 U10.11
T1IN10: JP11.7 U11.11
T1IN11: JP12.7 U12.11
T1IN12: JP13.7 U13.11
T1IN13: JP14.7 U14.11
T1IN14: JP15.7 U15.11
T1IN15: JP16.7 U16.11
T1IN16: JP17.7 U17.11
T1IN17: JP18.7 U18.11
T1IN18: JP19.7 U19.11
T1IN19: JP20.7 U20.11
T1IN20: JP21.7 U21.11
T1IN21: JP22.7 U22.11
T1IN22: JP23.7 U23.11
T1IN23: JP24.7 U24.11
T1OUT: JP2.1 U1.14
T1OUT1: JP1.1 U2.14
T1OUT2: JP3.1 U3.14
T1OUT3: JP4.1 U4.14
T1OUT4: JP5.1 U5.14
T1OUT5: JP6.1 U6.14
T1OUT6: JP7.1 U7.14
T1OUT7: JP8.1 U8.14
T1OUT8: JP9.1 U9.14
T1OUT9: JP10.1 U10.14
T1OUT10: JP11.1 U11.14
T1OUT11: JP12.1 U12.14
T1OUT12: JP13.1 U13.14
T1OUT13: JP14.1 U14.14
T1OUT14: JP15.1 U15.14
T1OUT15: JP16.1 U16.14
T1OUT16: JP17.1 U17.14
T1OUT17: JP18.1 U18.14
T1OUT18: JP19.1 U19.14
T1OUT19: JP20.1 U20.14
T1OUT20: JP21.1 U21.14
T1OUT21: JP22.1 U22.14
T1OUT22: JP23.1 U23.14
T1OUT23: JP24.1 U24.14
T2IN: JP2.8 U1.10
T2IN1: JP1.8 U2.10
T2IN2: JP3.8 U3.10
T2IN3: JP4.8 U4.10
T2IN4: JP5.8 U5.10
T2IN5: JP6.8 U6.10
T2IN6: JP7.8 U7.10
T2IN7: JP8.8 U8.10
T2IN8: JP9.8 U9.10
T2IN9: JP10.8 U10.10
T2IN10: JP11.8 U11.10
T2IN11: JP12.8 U12.10
T2IN12: JP13.8 U13.10
T2IN13: JP14.8 U14.10
T2IN14: JP15.8 U15.10
T2IN15: JP16.8 U16.10
T2IN16: JP17.8 U17.10
T2IN17: JP18.8 U18.10
T2IN18: JP19.8 U19.10
T2IN19: JP20.8 U20.10
T2IN20: JP21.8 U21.10
T2IN21: JP22.8 U22.10
T2IN22: JP23.8 U23.10
T2IN23: JP24.8 U24.10
T2OUT: JP2.2 U1.7
T2OUT1: JP1.2 U2.7
T2OUT2: JP3.2 U3.7
T2OUT3: JP4.2 U4.7
T2OUT4: JP5.2 U5.7
T2OUT5: JP6.2 U6.7
T2OUT6: JP7.2 U7.7
T2OUT7: JP8.2 U8.7
T2OUT8: JP9.2 U9.7
T2OUT9: JP10.2 U10.7
T2OUT10: JP11.2 U11.7
T2OUT11: JP12.2 U12.7
T2OUT12: JP13.2 U13.7
T2OUT13: JP14.2 U14.7
T2OUT14: JP15.2 U15.7
T2OUT15: JP16.2 U16.7
T2OUT16: JP17.2 U17.7
T2OUT17: JP18.2 U18.7
T2OUT18: JP19.2 U19.7
T2OUT19: JP20.2 U20.7
T2OUT20: JP21.2 U21.7
T2OUT21: JP22.2 U22.7
T2OUT22: JP23.2 U23.7
T2OUT23: JP24.2 U24.7
V+: C3.1 U1.2
V+1: C8.1 U2.2
V+2: C13.1 U3.2
V+3: C18.1 U4.2
V+4: C23.1 U5.2
V+5: C28.1 U6.2
V+6: C33.1 U7.2
V+7: C38.1 U8.2
V+8: C43.1 U9.2
V+9: C48.1 U10.2
V+10: C53.1 U11.2
V+11: C58.1 U12.2
V+12: C63.1 U13.2
V+13: C68.1 U14.2
V+14: C73.1 U15.2
V+15: C78.1 U16.2
V+16: C83.1 U17.2
V+17: C88.1 U18.2
V+18: C93.1 U19.2
V+19: C98.1 U20.2
V+20: C103.1 U21.2
V+21: C108.1 U22.2
V+22: C113.1 U23.2
V+23: C118.1 U24.2
V-: C4.1 U1.6
V-1: C9.1 U2.6
V-2: C14.1 U3.6
V-3: C19.1 U4.6
V-4: C24.1 U5.6
V-5: C29.1 U6.6
V-6: C34.1 U7.6
V-7: C39.1 U8.6
V-8: C44.1 U9.6
V-9: C49.1 U10.6
V-10: C54.1 U11.6
V-11: C59.1 U12.6
V-12: C64.1 U13.6
V-13: C69.1 U14.6
V-14: C74.1 U15.6
V-15: C79.1 U16.6
V-16: C84.1 U17.6
V-17: C89.1 U18.6
V-18: C94.1 U19.6
V-19: C99.1 U20.6
V-20: C104.1 U21.6
V-21: C109.1 U22.6
V-22: C114.1 U23.6
V-23: C119.1 U24.6
VCC: C5.1 JP2.5 U1.16
VCC1: C10.1 JP1.5 U2.16
VCC2: C15.1 JP3.5 U3.16
VCC3: C20.1 JP4.5 U4.16
VCC4: C25.1 JP5.5 U5.16
VCC5: C30.1 JP6.5 U6.16
VCC6: C35.1 JP7.5 U7.16
VCC7: C40.1 JP8.5 U8.16
VCC8: C45.1 JP9.5 U9.16
VCC9: C50.1 JP10.5 U10.16
VCC10: C55.1 JP11.5 U11.16
VCC11: C60.1 JP12.5 U12.16
VCC12: C65.1 JP13.5 U13.16
VCC13: C70.1 JP14.5 U14.16
VCC14: C75.1 JP15.5 U15.16
VCC15: C80.1 JP16.5 U16.16
VCC16: C85.1 JP17.5 U17.16
VCC17: C90.1 JP18.5 U18.16
VCC18: C95.1 JP19.5 U19.16
VCC19: C100.1 JP20.5 U20.16
VCC20: C105.1 JP21.5 U21.16
VCC21: C110.1 JP22.5 U22.16
VCC22: C115.1 JP23.5 U23.16
VCC23: C120.1 JP24.5 U24.16